# Altium PCB VentilatorRev1InterimDaughtercard.PcbDoc
Units mm, origin at the board's own origin, x right, y up, seen from the top; angles counter-clockwise.
Board outline 70 x 58 mm, 2 copper layers (Top Layer, Bottom Layer), stack 1.595 mm thick; 50 components, 46 nets, 183 pads, 47 vias.
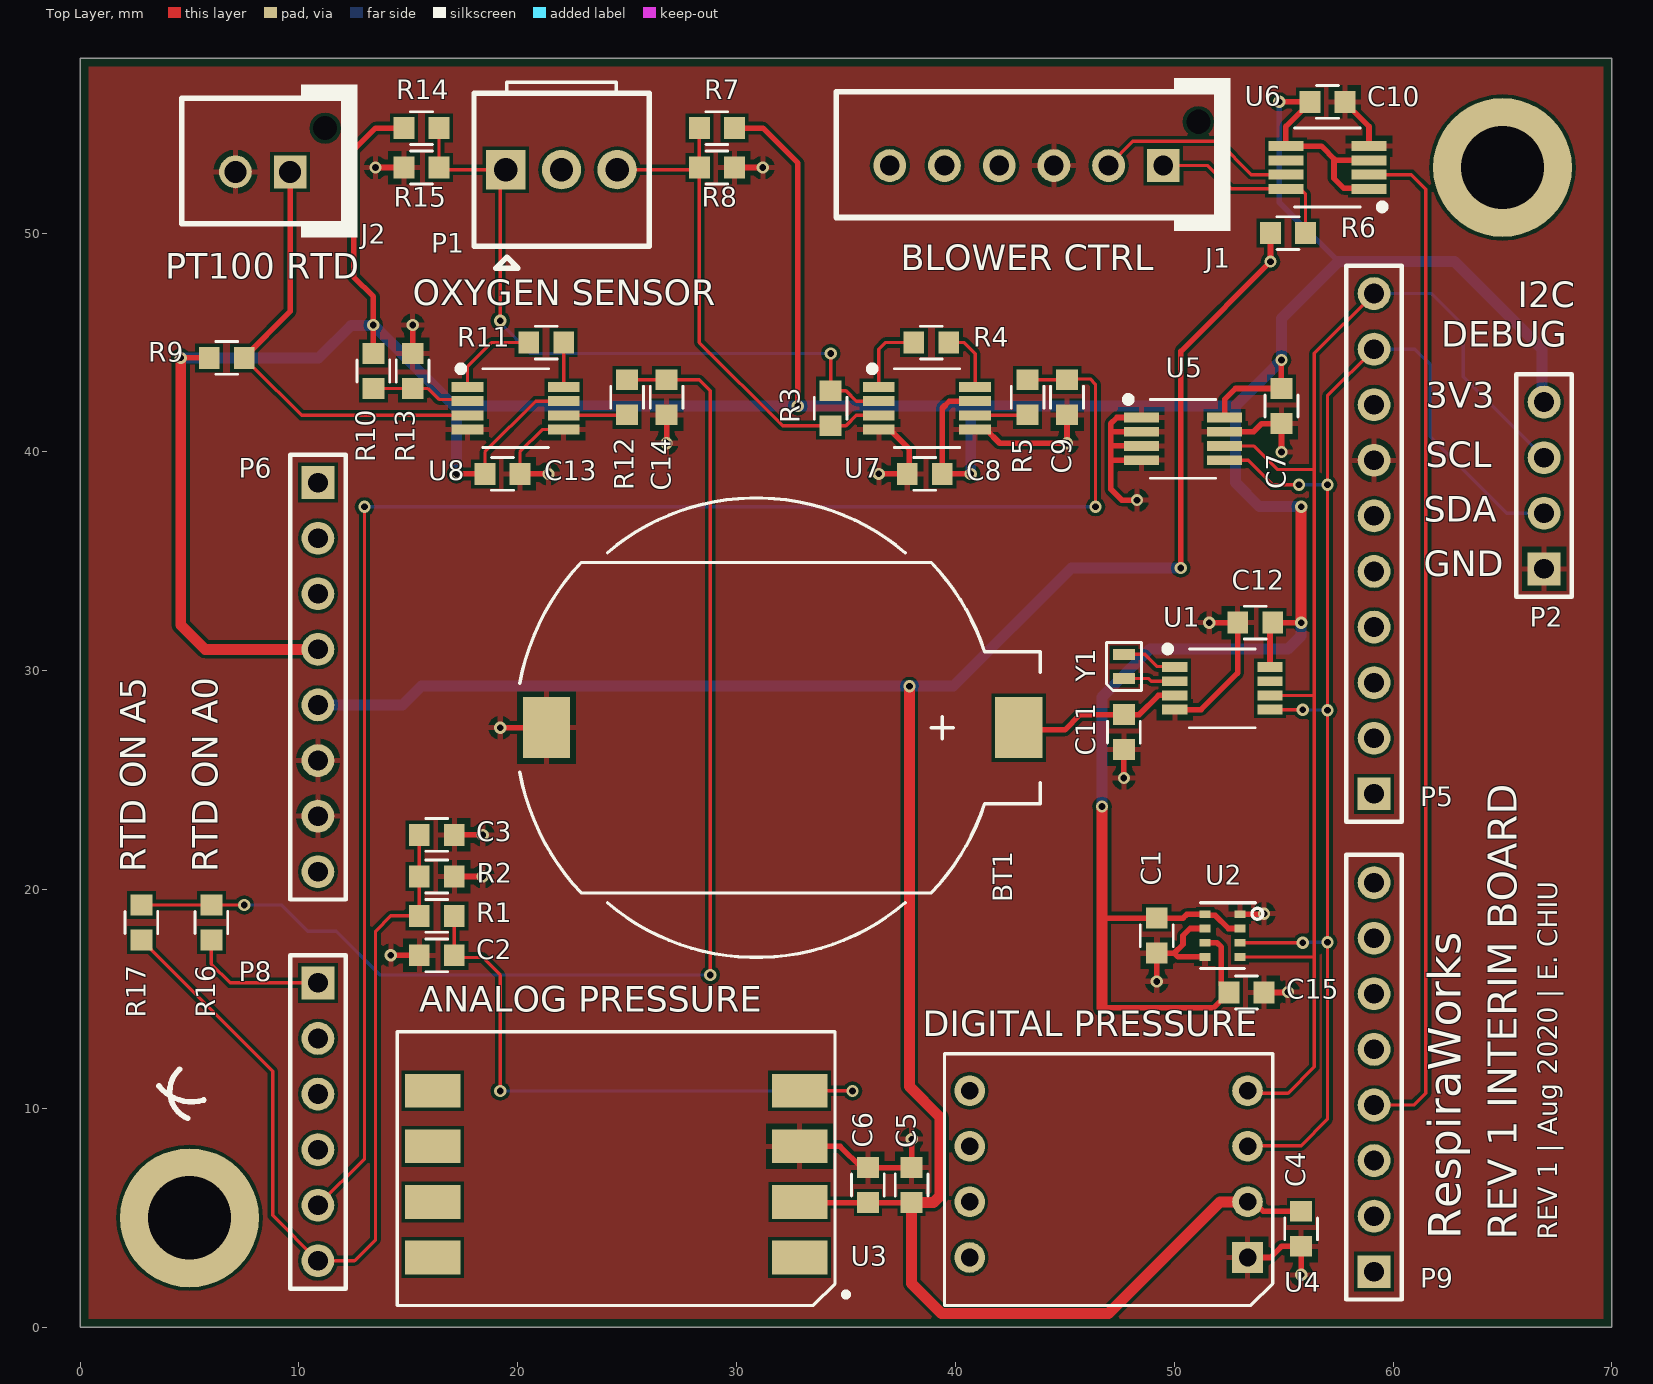
[diagram p0: Top Layer view]
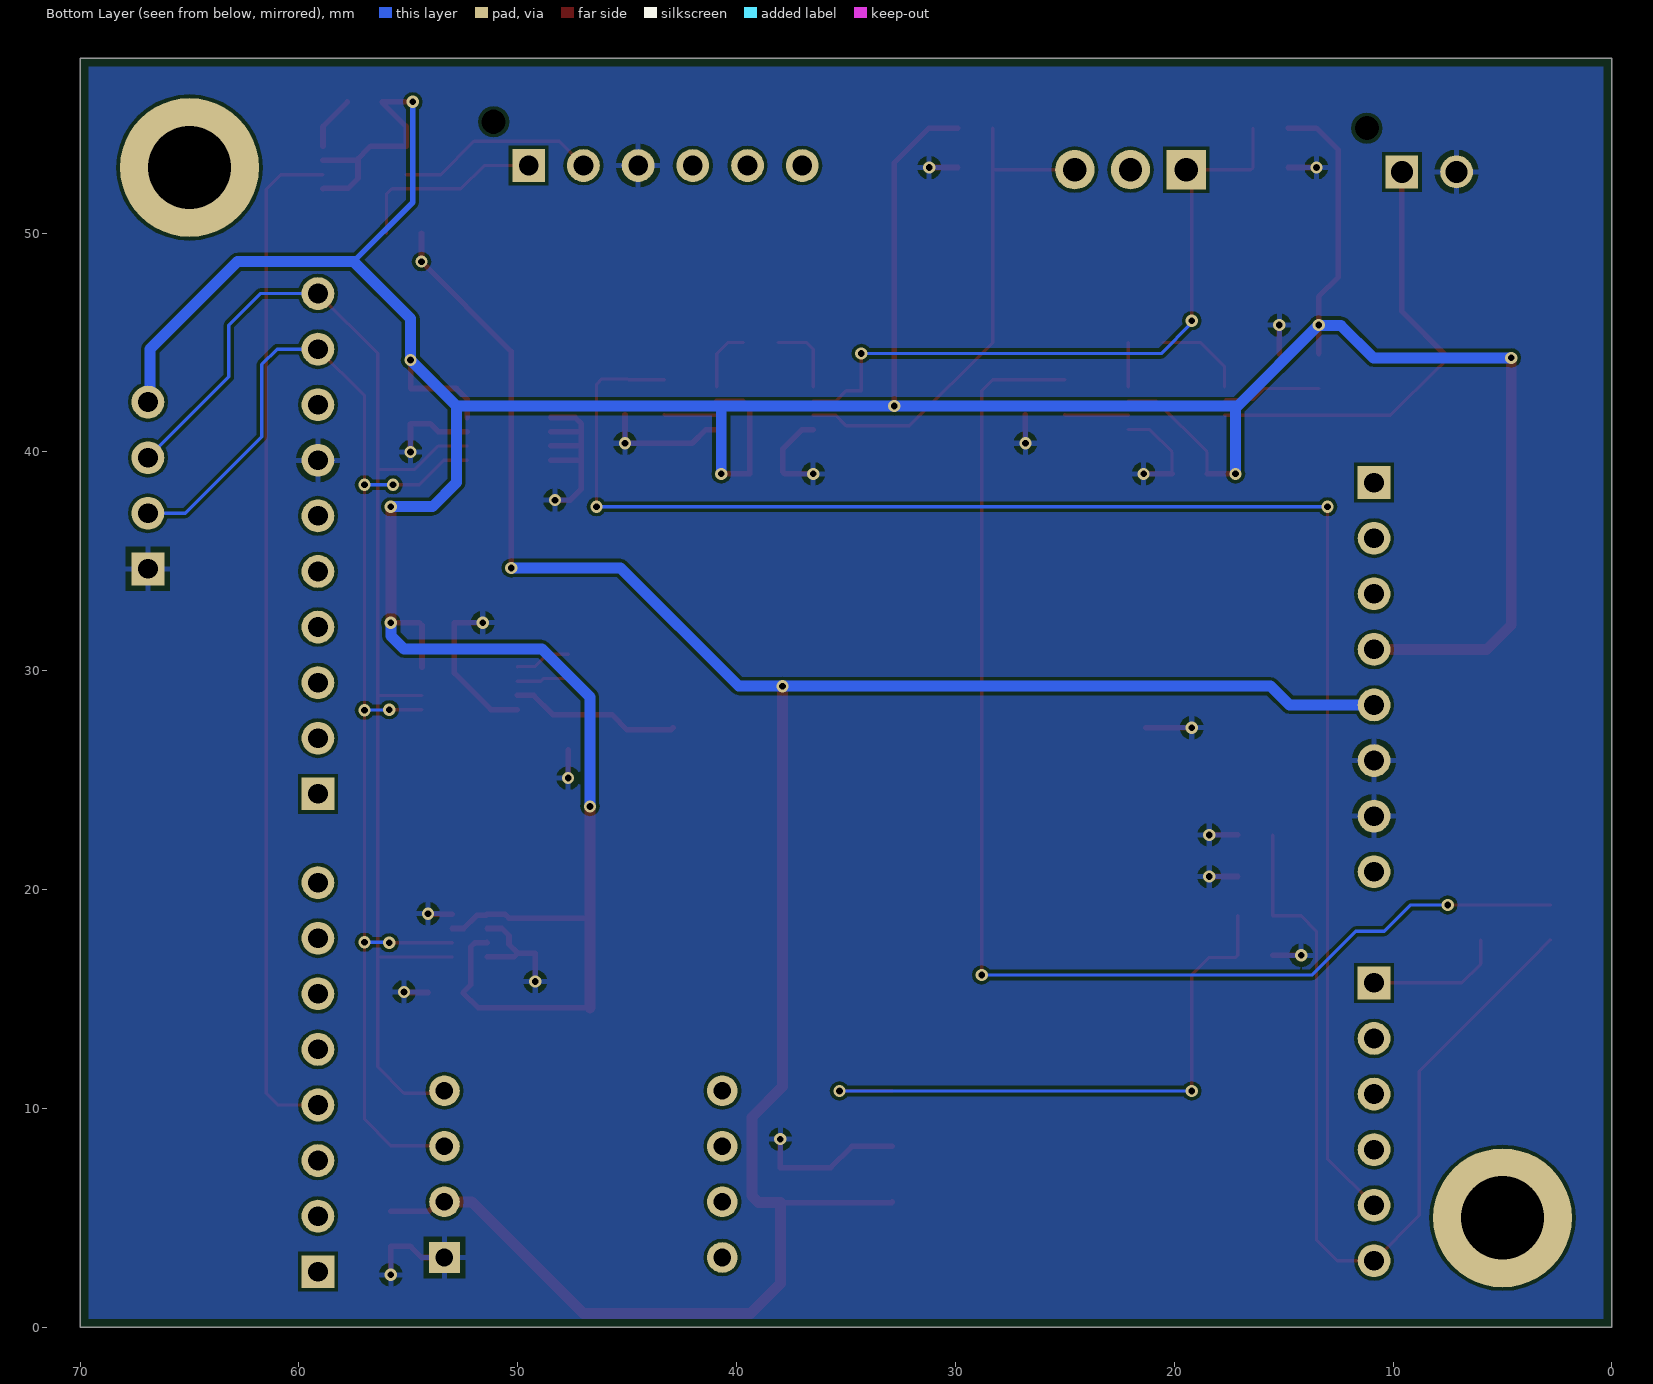
[diagram p1: Bottom Layer view, seen from below]

## Layer stack, top to bottom
Top Solder: solder mask 0.0102, Solder Resist, Dk 3.5
Top Layer: signal copper 0.0356
Dielectric 1: core 1.524, FR-4, Dk 4.2
Bottom Layer: signal copper 0.0356
Bottom Solder: solder mask 0.0102, Solder Resist, Dk 3.5

## Board outline
0,0 70,0 70,58 0,58

## Design rules (kind name [scope] priority, off if disabled: settings)
BoardOutlineClearance [All] p1: gap=0.381 ignorepadtopadclearanceinfootprint=FALSE
Clearance [All] p1: gap=0.152 ignorepadtopadclearanceinfootprint=FALSE
Height [All] p1: minheight=0 maxheight=50 prefheight=12.7
HoleSize [All] p1: absolutevalues=TRUE maxlimit=10 minlimit=0.305 maxpercent=80.000 minpercent=20.000
MinimumAnnularRing [All] p1: minimumring=0.127
MinimumSolderMaskSliver [All] p1: minsoldermaskwidth=0.025
PlaneConnect [All] p1: planeconnectstyle=Direct reliefexpansion=0.508 reliefentries=4 reliefconductorwidth=0.254 reliefairgap=0.254
PolygonConnect [All] p1: connectstyle=Relief reliefconductorwidth=0.254 reliefentries=4 polygonreliefangle="90 Angle" airgapwidth=0.254
RoomDefinition VentilatorRev1InterimDaughtercard [InComponentClass('VentilatorRev1InterimDaughtercard')] p1 off: confinementstyle=ConfineIn formatcopy=TRUE lockcomponents=FALSE outline 90.043,1.524 293.878,1.524 293.878,29.972 90.043,29.972
RoutingVias [All] p1: holewidth=0.711 width=1.27 viastyle="Through Hole" minholewidth=0.711 minwidth=1.27 maxholewidth=0.711 maxwidth=1.27
SilkToSilkClearance [All] p1: silktosilkclearance=0.076
SilkToSolderMaskClearance [IsPad] p1: minsilkscreentomaskgap=0.076 clearancetoexposedcopper=TRUE
SolderMaskExpansion [All] p1: expansion=0.05 istentingtop=FALSE
Width [All] p1: maxlimit=10 minlimit=0.152 preferedwidth=0.152
24 further rules are at their usual default settings.

## Components (designator, comment, footprint, x,y, rotation, side; value= is the part's Value field where it differs from the comment)
BT1 "CR2016" BLP20 30.9,27.4 r180 top locked
C1 "CAP 0603" CAP0603 49.2,17.9 r270 top value=0.1uF
C2 "CAP 0603" CAP0603 16.3,17 r180 top value=470pF
C3 "CAP 0603" CAP0603 16.3,22.5 r0 top value=1.5uF
C4 "CAP 0603" CAP0603 55.8,4.5 r270 top value=0.1uF
C5 "CAP 0603" CAP0603 38,6.5 r270 top value=1uF
C6 "CAP 0603" CAP0603 36,6.5 r270 top value=0.01uF
C7 "CAP 0603" CAP0603 54.9,42.1 r270 top value=0.1uF
C8 "CAP 0603" CAP0603 38.6,39 r180 top value=0.1uF
C9 "CAP 0603" CAP0603 45.1,42.5 r270 top value=1.5uF
C10 "CAP 0603" CAP0603 57,56 r0 top value=0.1uF
C11 "CAP 0603" CAP0603 47.7,27.2 r270 top value=0.1uF
C12 "CAP 0603" CAP0603 53.7,32.2 r180 top value=0.1uF
C13 "CAP 0603" CAP0603 19.3,39 r0 top value=0.1uF
C14 "CAP 0603" CAP0603 26.8,42.5 r270 top value=1.5uF
C15 "CAP 0603" CAP0603 53.3,15.3 r0 top value=0.1uF
J1 "B6B-XH-AM(LF)(SN)" JST_B6B-XH-AM 49.5,53.09 r180 top locked
J2 "B2B-XH-AM(LF)(SN)" JST_B2B-XH-AM 9.6,52.8 r180 top locked
P1 "KK 3.0" 22232031 22,52.9 r0 top locked
P2 "Header 4" HDR1X4 66.9,34.66 r90 top locked
P5 "0.100\" Sockets" ESQ-110-14-T-S 59.13,24.38 r90 top locked
P6 "0.100\" Sockets" ESQ-108-14-T-S 10.87,38.6 r270 top locked
P8 "0.100\" Sockets" ESQ-106-14-T-S 10.87,15.74 r270 top locked
P9 "0.100\" Sockets" ESQ-108-14-T-S 59.13,2.54 r90 top locked
R1 "RES 0603" RES0603 16.3,18.8 r0 top value=1.5k
R2 "RES 0603" RES0603 16.3,20.6 r0 top value=3k
R3 "RES 0603" RES0603 34.3,42 r270 top value=10k
R4 "RES 0603" RES0603 38.9,45 r0 top value=2.05k
R5 "RES 0603" RES0603 43.3,42.5 r90 top value=1k
R6 "RES 0603" RES0603 55.2,50 r0 top value=0
R7 "RES 0603" RES0603 29.1,54.8 r180 top value=10k
R8 "RES 0603" RES0603 29.1,53 r0 top value=10k
R9 "RES 0603" RES0603 6.7,44.3 r0 top value=2.7k
R10 "RES 0603" RES0603 13.4,43.7 r270 top value=2.7k
R11 "RES 0603" RES0603 21.3,45 r0 top value=3.0k
R12 "RES 0603" RES0603 25,42.5 r90 top value=1k
R13 "RES 0603" RES0603 15.2,43.7 r90 top value=82.0
R14 "RES 0603" RES0603 15.6,54.8 r0 top value=10k
R15 "RES 0603" RES0603 15.6,53 r180 top value=10k
R16 "RES 0603" RES0603 6,18.5 r270 top value=0
R17 "RES 0603" RES0603 2.8,18.5 r270 top value=0
U1 "PCF85363ATT/AJ" 8-MSOP-3.0MM 52.2,29.2 r0 top
U2 "BMP280" BMP280 52.2,17.9 r0 top
U3 "MPXV5010DP" 8-SOP-MPXV 24.5,7 r180 top locked
U4 "4525DO-DS5AI001DP" 4525do 47,7 r180 top locked
U5 "256Kbit" 8-MSOP 50.4,40.6 r0 top value=32Kbit
U6 "SN74LVC2T45DCTR" 8-MSOP 57,53 r180 top
U7 "INA333" 8-VSSOP 38.7,42 r0 top
U8 "INA333" 8-VSSOP 19.9,42 r0 top
Y1 "32.7680KHZ" 2-ABS05 47.7,30.2 r90 top

## Footprints (in the part's own frame and the unit in brackets; to place one, negate y for a bottom-side part, rotate by r counter-clockwise, add the part's x,y. Pads: shape width x height; smd on the part's side, far side on the other; paste and mask are expansions set on the pad)
2-ABS05 [mm] "2-pin 1.0x1.6mm SMT Crystal Footprint"
  rect 0.5x1 smd: 1(-0.55,0) 2(0.55,0)
  silkscreen extent -1.1,-0.8 1.1,0.8, body extent -0.8,-0.5 0.8,0.5, height 0.5
8-MSOP [mm] "8-pin MSOP (2.80mm wide)"
  rect 1.6x0.45 smd: 1(-1.9,0.975) 2(-1.9,0.325) 3(-1.9,-0.325) 4(-1.9,-0.975) 5(1.9,-0.975) 6(1.9,-0.325) 7(1.9,0.325) 8(1.9,0.975)
  silkscreen extent -2.64,-1.8 1.5,1.94, body extent -2.12,-1.57 2.12,1.58, height 1.3
8-MSOP-3.0MM [mm] "8-pin MSOP (3.00mm wide)"
  rect 1.15x0.45 smd: 1(-2.175,0.975) 2(-2.175,0.325) 3(-2.175,-0.325) 4(-2.175,-0.975) 5(2.175,-0.975) 6(2.175,-0.325) 7(2.175,0.325) 8(2.175,0.975)
  silkscreen extent -2.64,-1.8 1.5,1.94, body extent -2.12,-1.57 2.12,1.58, height 1.3
8-SOP-MPXV [mm] "8-pin SOP Dual Ported Pressure Sensor Package"
  rect 2.54x1.54 smd: 1(-8.38,3.81) 2(-8.38,1.27) 3(-8.38,-1.27) 4(-8.38,-3.81) 5(8.38,-3.81) 6(8.38,-1.27) 7(8.38,1.27) 8(8.38,3.81)
  silkscreen extent -10.6,-6.5 10,6, body extent -8.79,-6.04 8.79,12.38, height 10.47
8-VSSOP [mm] "8-pin VSSOOP (3.0mm wide)"
  rect 1.45x0.45 smd: 1(-2.2,0.975) 2(-2.2,0.325) 3(-2.2,-0.325) 4(-2.2,-0.975) 5(2.2,-0.975) 6(2.2,-0.325) 7(2.2,0.325) 8(2.2,0.975)
  silkscreen extent -2.64,-1.8 1.5,1.94, body extent -2.12,-1.57 2.12,1.58, height 1.3
4525do [mm] "4525 DIP Pressure Sensor"
  rect 1.4x1.4 hole 0.8: 1(-6.35,3.81)
  round 1.4 hole 0.8: 2(-6.35,1.27) 3(-6.35,-1.27) 4(-6.35,-3.81) 5(6.35,-3.81) 6(6.35,-1.27) 7(6.35,1.27) 8(6.35,3.81)
  silkscreen extent -7.5,-5.5 7.5,6, body extent -6.48,-4.81 6.48,12.67, height 9.13
22232031 [mm] "Molex KK 0.100\" Male Header"
  rect 1.8x1.8 hole 1.07: 1(-2.54,0)
  round 1.8 hole 1.07: 2(0,0) 3(2.54,0)
  silkscreen extent -4,-4.5 4,4, body extent -3.73,-3.25 3.73,3.1, height 10.68
BLP20 [mm] "MPD 20mm Coin Cell Battery Holder footprint"
  rect 2.16x2.79 smd: M(9.59,0) P(-12,0)
  silkscreen extent -12.98,-10.5 10.81,10.5, body extent -10,-10 10,10, height 2.1
BMP280 [mm] "BOSCH ABS PRESSURE SENSOR"
  rect 0.5x0.35 smd: 1(0.8,0.975) 2(0.8,0.325) 3(0.8,-0.325) 4(0.8,-0.975) 5(-0.8,-0.975) 6(-0.8,-0.325) 7(-0.8,0.325) 8(-0.8,0.975)
  silkscreen extent -1,-1.5 1.85,1.5, body extent -1,-1.25 1,1.25, height 1
CAP0603 [mm] "0603 SMT Capacitor Footprint"
  rect 0.95x1 smd: 1(0.8,0) 2(-0.8,0)
  silkscreen extent -0.5,-0.75 0.5,0.75, body extent -0.8,-0.4 0.8,0.4, height 0.8
ESQ-106-14-T-S [mm] "Tall Connector; Header; 6 Position"
  rect 1.5x1.5 hole 0.9: 1(0,0)
  round 1.5 hole 0.9: 2(2.54,0) 3(5.08,0) 4(7.62,0) 5(10.16,0) 6(12.7,0)
  silkscreen extent -1.27,-1.27 13.97,1.27, body extent -1.52,-1.27 14.22,1.27, height 11.01
ESQ-108-14-T-S [mm] "Tall Connector; Header; 8 Position"
  rect 1.5x1.5 hole 0.9: 1(0,0)
  round 1.5 hole 0.9: 2(2.54,0) 3(5.08,0) 4(7.62,0) 5(10.16,0) 6(12.7,0) 7(15.24,0) 8(17.78,0)
  silkscreen extent -1.27,-1.27 19.05,1.27, body extent -1.52,-1.27 19.3,1.27, height 11.01
ESQ-110-14-T-S [mm] "Tall Connector; Header; 10 Position"
  rect 1.5x1.5 hole 0.9: 1(0,0)
  round 1.5 hole 0.9: 2(2.54,0) 3(5.08,0) 4(7.62,0) 5(10.16,0) 6(12.7,0) 7(15.24,0) 8(17.78,0) 9(20.32,0) 10(22.86,0)
  silkscreen extent -1.27,-1.27 24.13,1.27, body extent -1.52,-1.27 24.38,1.27, height 11.01
HDR1X4 [mm] "Connector; Header; 4 Position"
  rect 1.5x1.5 hole 0.9: 1(0,0)
  round 1.5 hole 0.9: 2(2.54,0) 3(5.08,0) 4(7.62,0)
  silkscreen extent -1.27,-1.27 8.89,1.27
JST_B2B-XH-AM [mm] "CONN HEADER VERT MTG 2POS 2.5MM JST XH"
  rect 1.5x1.5 hole 1: 1(0,0)
  round 1.5 hole 1: 2(2.5,0)
  rect 0x0 hole 1.1 unplated: MH(-1.6,-2)
  silkscreen extent -3.07,-4 4.95,3, body extent -2.45,-3.38 4.95,2.38, height 7
JST_B6B-XH-AM [mm] "CONN HEADER VERT MTG 6POS 2.5MM JST XH"
  rect 1.5x1.5 hole 0.9: 1(0,0)
  round 1.5 hole 0.9: 2(2.5,0) 3(5,0) 4(7.5,0) 5(10,0) 6(12.5,0)
  rect 0x0 hole 1.1 unplated: MH(-1.6,-2)
  silkscreen extent -3.07,-4 14.95,3, body extent -2.45,-3.38 14.95,2.38, height 8.1
RES0603 [mm] "0603 SMT Resistor  Footprint"
  rect 0.95x1 smd: 1(0.8,0) 2(-0.8,0)
  silkscreen extent -0.5,-0.75 0.5,0.75, body extent -0.8,-0.4 0.8,0.4, height 0.8

## Part data
BT1: library part BLP2016SM-GTR, "CR2016 Coil Cell Battery Holder", Manufacturer=MPD, PCB Package=BLP20, Voltage=3V, Manufacturer P/N=BLP2016SM-GTR
C1 C4 C7 C8 C10 C11 C12 C13 C15: "Cap 0603", Manufacturer=Murata, Manufacturer P/N=GRM188R71H104KA93D, PCB Package=0603, Voltage=50V, Type=X7R
C2: "Cap 0603", Manufacturer=Yageo, Manufacturer P/N=CC0603MRX7R9BB471, PCB Package=0603, Voltage=50V, Type=X7R
C3 C9 C14: "Cap 0603", Manufacturer=TDK, Manufacturer P/N=C1608X7R1A155K080AC, PCB Package=0603, Voltage=10V, Type=X7R
C5: "Cap 0603", Manufacturer=Yageo, Manufacturer P/N=CC0603KRX7R6BB105, PCB Package=0603, Voltage=10V, Type=X7R
C6: "Cap 0603", Manufacturer=Samsung, Manufacturer P/N=CL10B103KO8NNNC, PCB Package=0603, Voltage=16V, Type=X7R
J1: "CONN HEADER VERT 6POS 2.5MM", Color=Natural, Manufacturer="JST Sales America Inc.", Supplier Part Number 1=455-1708-ND, Category="Connectors, Interconnects", ComponentLink1Description=http://www.jst-mfg.com/product/pdf/eng/ePH.pdf, ComponentLink1URL=http://www.jst-mfg.com/product/pdf/eng/ePH.pdf, Connector Type="Header, Shrouded", Contact Finish=Tin, Contact Finish Thickness=-, Contact Mating Length="0.130\" (3.30mm)", Contact Type="Male Pin", Fastening Type="Detent Lock", Features=-, Manufacturer P/N=B6B-XH-AM(LF)(SN), Mounting Type="Through Hole", Number of Positions=6, Number of Positions Loaded=All, Number of Rows=1, Packaging=Bulk, Part Status=Active, Pitch="0.079\" (2.00mm)", Pricing 1="1=0.33, 10=0.313, 100=0.2194, 500=0.18808, 1000=0.15674, 5000=0.13435, 10000=0.12539 (USD)", RoHS="RoHS Compliant", Row Spacing=-, Stock 1=30111, Supplier 1=Digi-Key, Termination="Press-Fit, Solder"
J2: "CONN HEADER VERT 2POS 2.5MM", Color=Natural, Manufacturer="JST Sales America Inc.", Supplier Part Number 1=455-1704-ND, Category="Connectors, Interconnects", ComponentLink1Description=http://www.jst-mfg.com/product/pdf/eng/ePH.pdf, ComponentLink1URL=http://www.jst-mfg.com/product/pdf/eng/ePH.pdf, Connector Type="Header, Shrouded", Contact Finish=Tin, Contact Finish Thickness=-, Contact Mating Length="0.130\" (3.30mm)", Contact Type="Male Pin", Fastening Type="Detent Lock", Features=-, Manufacturer P/N=B2B-XH-AM(LF)(SN), Mounting Type="Through Hole", Number of Positions=2, Number of Positions Loaded=All, Number of Rows=1, Packaging=Bulk, Part Status=Active, Pitch="0.079\" (2.00mm)", Pricing 1="1=0.17, 10=0.162, 100=0.1002, 500=0.08288, 1000=0.07252, 5000=0.06216, 10000=0.06044 (USD)", RoHS="RoHS Compliant", Row Spacing=-, Stock 1=207967, Supplier 1=Digi-Key, Termination="Press-Fit, Solder"
P1: library part 22232031, "Conn, KK 0.100\" Male Header", Manufacturer=Molex, Manufacturer P/N=22232031
P2: "Header, 4-Pin", Do Not Populate=DNP, LatestRevisionDate=17-Jul-2002, LatestRevisionNote="Re-released for DXP Platform.", Publisher="Altium Limited"
P5: library part ESQ-110-14-T-S, "Tall Female Header 0.100\" Pitch 8x1 Sockets", Manufacturer=Samtec, Do Not Populate=DNP, PCB Package=ESQ-110-14-T-S
P6 P9: library part ESQ-108-14-T-S, "Tall Female Header 0.100\" Pitch 8x1 Sockets", Manufacturer=Samtec, Do Not Populate=DNP, PCB Package=ESQ-108-14-T-S
P8: library part ESQ-106-14-T-S, "Tall Female Header 0.100\" Pitch 6x1 Sockets", Manufacturer=Samtec, Do Not Populate=DNP, PCB Package=ESQ-106-14-T-S
R1: "Res 0603", Manufacturer=Yageo, Manufacturer P/N=RC0603FR-071K5L, PCB Package=0603, Tolerance=1%
R2: "Res 0603", Manufacturer=Yageo, Manufacturer P/N=RC0603FR-073KL, PCB Package=0603, Tolerance=1%
R3 R7 R8 R14 R15: "Res 0603", Manufacturer=Yageo, Manufacturer P/N=RC0603FR-0710KL, PCB Package=0603, Tolerance=1%
R4: "Res 0603", Manufacturer=Yageo, Manufacturer P/N=RT0603BRD072K05L, PCB Package=0603, Tolerance=0.1%
R5 R12: "Res 0603", Manufacturer=Yageo, Manufacturer P/N=RC0603FR-071KL, PCB Package=0603, Tolerance=1%
R6 R16 R17: "Res 0603", Manufacturer=Yageo, Manufacturer P/N=RC0603JR-070RL, PCB Package=0603, Tolerance=5%, Do Not Populate=DNP
R9 R10: "Res 0603", Manufacturer=Panasonic, Manufacturer P/N=ERA-3AEB272V, PCB Package=0603, Tolerance=0.1%
R11: "Res 0603", Manufacturer=Yageo, Manufacturer P/N=RT0603BRE073KL, PCB Package=0603, Tolerance=0.1%
R13: "Res 0603", Manufacturer=Panasonic, Manufacturer P/N=ERA-3AEB820V, PCB Package=0603, Tolerance=0.1%
U1: "Real Time Clock (RTC) IC Clock/Calendar 64B I²C, 2-Wire Serial 8-TSSOP, 8-MSOP (0.118\", 3.00mm Width)", Manufacturer=NXP, PCB Package=8-MSOP-3.0MM, Manufacturer P/N=PCF85363ATT/AJ
U2: "Pressure Sensor 4.35PSI ~ 15.95PSI (30kPa ~ 110kPa) Absolute  16b 8-SMD", Manufacturer="Bosch Sensortec", Manufacturer P/N=BMP280, PCB Package=BMP280
U3: "Pressure Sensor 1.45PSI (10kPa) Differential Male - 0.13\" (3.3mm) Tube, Dual 0.2 V ~ 4.7 V 8-BSOP (0.475\", 12.06mm Width) Dual Ports, Same Side", Manufacturer=NXP, PCB Package=8-SOP-MPXV, Do Not Populate=DNP, Manufacturer P/N=MPXV5010DP
U4: "Pressure Sensor 1PSI (6.89kPa) Differential Male - 0.14\" (3.56mm) Tube, Dual 14 b 8-DIP Module", Manufacturer="TE Connectivity", PCB Package=4525DO, Do Not Populate=DNP, Manufacturer P/N=4525DO-DS5AI001DP
U5: library part 24LC256T-I/MS, "IC EEPROM 256KBIT I2C 400KHZ 8MSOP", Manufacturer=Microchip, PCB Package=8-MSOP, Tolerance=25ppm, Manufacturer P/N=24LC256T-I/MS
U6: "Bidirectional Level Shifter 2-ch", Manufacturer="Texas Instruments", PCB Package=16-TSSOP, Manufacturer P/N=SN74LVC2T45DCTR
U7 U8: "Instrumentation Amp, GBW=1MHz", Manufacturer="Texas Instruments", Manufacturer P/N=INA333AIDGKR, PCB Package=8-VSSOP
Y1: library part ABS05-32.768KHZ-T, "CRYSTAL 32.7680KHZ 12.5PF SMD 1x1.6mm", Manufacturer=Abracon, Tolerance=20ppm, Manufacturer P/N=ABS05-32.768KHZ-T, PCB Package=ABS05-32.768KHZ-T

## Free pads (board coordinates)
  round 6.35 hole 3.81: M1(5,5) M2(65,53)

## Via types
v1: diameter 0.559, hole 0.305, Top Layer to Bottom Layer, tented both sides, 47 vias

## Nets (pads, with @x,y where several pads share a name; then routed paths per layer and width w, separated by ;. In a path a pad name is that pad's centre, name@x,y a point inside that pad or via, vN(x,y) a via of type N, cw(c..) or ccw(c..) an arc to the next point about the centre after c; other vN are vias at no path point)
3V3: C1.2 C7.2 C8.2 C10.2 C12.2 C13.2 C15.2 P2.4 P6.4 R7.2 R9.2 R10.2 R14.2 U1.8 U2.2 U2.6 U2.8 U5.8 U6.1 U6.3 U6.5 U7.7 U8.7 | length 219.2
  Top Layer w0.152: C13.2 18.5,40 20.825,42.325 U8.7
  Top Layer w0.254: v1(4.6,44.3) R9.2 ; R10.2 v1(13.4,45.8) 13.4,47.1 12.5,48 12.5,53.8 13.5,54.8 R14.2 ; v1(17.2,39) C13.2 ; R7.2 31.2,54.8 32.8,53.2 v1(32.8,42.1) ; v1(40.7,39) C8.2 39.4,42 39.725,42.325 U7.7 ; 46.7,14.6 51.8,14.6 52.127,14.927 52.152,14.927 52.5,15.275 C15.2 52.152,15.648 52.152,17.374 51.951,17.575 U2.6 U2.6@51.415,17.59 ; 46.7,18.7 C1.2 50.4,18.7 50.575,18.875 U2.8 51.448,18.827 51.873,18.827 52.475,18.225 U2.2 ; U5.8 52.3,42.4 52.8,42.9 C7.2 v1(54.9,44.2) ; U1.8 54.375,32.075 C12.2 v1(55.8,32.2) ; v1(54.8,56) C10.2 56.2,55.975 55.1,54.875 U6.5 56.725,53.975 57.375,53.325 U6.3 ; 57.3,53.4 57.3,52.5 57.752,52.048 58.877,52.048 U6.1
  Top Layer w0.5: v1(4.6,44.3) 4.6,32.1 5.72,30.98 P6.4 ; 46.7,14.6 46.7,18.7 v1(46.7,23.8) ; v1@55.8,32.2 v1(55.8,37.5)
  Bottom Layer w0.254: v1(54.8,56) 54.8,51.4 57.5,48.7
  Bottom Layer w0.5: v1(4.6,44.3) 10.9,44.3 12.389,45.789 13.389,45.789 v1(13.4,45.8) 17.1,42.1 ; v1(17.2,39) 17.2,42 17.1,42.1 ; v1(40.7,39) 40.7,42 40.8,42.1 ; v1(46.7,23.8) 46.7,28.8 48.9,31 55.2,31 55.789,31.589 55.789,32.189 v1(55.8,32.2) ; v1(55.8,37.5) 53.9,37.5 52.8,38.6 52.8,42.1 ; P2.4 66.8,42.38 66.8,44.7 62.8,48.7 57.5,48.7 54.9,46.1 v1(54.9,44.2) 52.8,42.1 ; 17.1,42.1 40.8,42.1 ; 40.8,42.1 52.8,42.1
5V: C4.2 C5.1 C6.1 P6.5 R6.2 U3.2 U4.2 | length 113.8
  Top Layer w0.254: U3.2 32.91,5.7 C6.1 C5.1 ; v1(50.3,34.7) 50.3,44.6 v1(54.4,48.7) R6.2 ; U4.2 53.642,5.73 54.072,5.3 54.8,5.3 C4.2
  Top Layer w0.5: v1(37.9,29.3) 37.9,11 39.3,9.6 39.3,5.993 39.007,5.7 C5.1 38,2 39.369,0.631 47,0.631 52.099,5.73 U4.2
  Bottom Layer w0.5: P6.5 14.74,28.44 15.6,29.3 v1(37.9,29.3) 39.9,29.3 45.3,34.7 v1(50.3,34.7)
A0: P8.1 R16.1 | length 6.3
  Top Layer w0.152: R16.1 6,16.6 6.86,15.74 P8.1
A1: P8.2
A2: P8.3
A3: P8.4
A4: C9.2 P8.5 R5.1 | length 75
  Top Layer w0.152: P8.5 13,7.71 v1(13,37.5) ; R5.1 44.925,43.3 44.962,43.337 46.163,43.337 46.4,43.1 v1(46.4,37.5)
  Bottom Layer w0.152: v1(13,37.5) v1(46.4,37.5)
A5: C3.2 P8.6 R1.2 R2.2 R17.1 | length 41.1
  Top Layer w0.152: R17.1 2.825,17.7 3.224,17.301 3.224,17.276 8.8,11.7 8.8,5.11 P8.6 12.54,3.04 13.5,4 13.5,18.1 14.2,18.8 14.787,18.8 R1.2 R2.2 C3.2
AVDD: P5.8
BLOWER-CTRL: P9.4 U6.2 | length 46.8
  Top Layer w0.152: U6.2 60.825,52.675 61.5,52 61.5,48.7 61.5,10.7 60.96,10.16 P9.4
BLOWER-CTRL-5V: J1.2 U6.7 | length 9.2
  Top Layer w0.152: J1.2 48.11,54.2 52,54.2 53.525,52.675 U6.7
D2: P9.3
D4: P9.5
D7: P9.8
D8: P5.1
GND: BT1.M C1.1 C2.1 C3.1 C4.1 C5.2 C6.2 C7.1 C8.1 C9.1 C10.1 C11.1 C12.1 C13.1 C14.1 C15.1 J1.3 J2.2 P2.1 P5.7 P6.6 P6.7 R2.1 R8.1 R13.1 R15.1 U1.4 U2.1 U2.5 U2.7 U3.3 U4.1 U5.1 U5.2 U5.3 U5.4 U5.7 U6.4 U7.4 U7.5 U8.4 U8.5 | length 69.3
  Top Layer w0.152: C13.1 20.1,40 21.125,41.025 U8.5
  Top Layer w0.254: v1(13.5,53) R15.1 ; v1(14.2,17) C2.1 ; R13.1 v1(15.2,45.8) ; R2.1 v1(18.4,20.6) ; C3.1 v1(18.4,22.5) ; v1(19.2,27.4) BT1.M ; C13.1 v1(21.4,39) ; v1(26.8,40.4) C14.1 ; R8.1 v1(31.2,53) ; U3.3 34.73,8.27 35.7,7.3 C6.2 C5.2 v1(38,8.6) ; v1(36.5,39) C8.1 37.9,39.1 37.9,40.125 37,41.025 U7.4 ; U7.5 41.4,41.025 42.025,40.4 v1(45.1,40.4) C9.1 ; v1(47.7,25.1) C11.1@47.7,26.4 ; v1(48.3,37.8) 47.6,37.8 47.1,38.3 47.1,39.6 ; U5.4 47.125,39.625 47.1,39.6 ; U5.3 47.125,40.275 47.1,40.3 ; U5.2 47.125,40.925 47.1,40.9 ; U5.1 47.375,41.575 47.1,41.3 47.1,40.9 ; v1(49.2,15.8) C1.1 50,17.1 ; U1.4 51.225,28.225 52.9,29.9 C12.1 v1(51.6,32.2) ; U2.5 50.175,16.925 50,17.1 ; U2.7 50.725,18.225 50.4,17.9 50.4,17.5 50,17.1 ; U5.7 53.625,40.925 54,41.3 C7.1 v1(54.9,40) ; U2.1 v1@53.875,18.875 ; U4.1 54.39,3.19 54.9,3.7 C4.1 v1(55.8,2.4) ; C15.1 v1@54.975,15.3 ; C10.1 57.8,55.975 58.9,54.875 U6.4 ; 47.1,39.6 47.1,40.3 ; 47.1,40.3 47.1,40.9
  other v1: 55.2,15.325 54.1,18.9
IOREF: P6.2
MISO-D12: P5.5
NetBT1_P: BT1.P C11.2 U1.3 | length 7.8
  Top Layer w0.254: BT1.P 43,27.3 45,27.3 45.7,28 C11.2 48.4,28 49.275,28.875 U1.3
NetC2_2: C2.2 R1.1 U3.4 | length 28.1
  Top Layer w0.152: R1.1 C2.2 17.2,16.9 18.4,16.9 19.2,16.1 v1(19.2,10.8) ; U3.4 35.29,10.81 v1(35.3,10.8)
  Bottom Layer w0.152: v1(19.2,10.8) v1(35.3,10.8)
NetC14_2: C14.2 R12.1 R16.2 R17.2 | length 58
  Top Layer w0.152: R17.2 v1(7.5,19.3) ; R12.1 28.3,43.3 28.8,42.8 v1(28.8,16.1)
  Bottom Layer w0.152: v1(7.5,19.3) 9.2,19.3 10.4,18.1 11.7,18.1 13.7,16.1 v1(28.8,16.1)
NetJ1_1: J1.1 R6.1 U6.8 | length 8.8
  Top Layer w0.152: J1.1 51.535,53.09 52.6,52.025 U6.8 55.75,52.025 56,51.775 R6.1
NetJ2_1: J2.1 R9.1 U8.3 | length 20.7
  Top Layer w0.152: R9.1@7.5,44.275 7.899,43.876 7.924,43.876 10.125,41.675 U8.3
  Top Layer w0.254: R9.1@7.5,44.275 R9.1 7.5,44.325 9.6,46.425 J2.1
NetR4_1: R4.1 U7.8 | length 2.9
  Top Layer w0.152: R4.1 40.4,45 40.9,44.5 U7.8
NetR4_2: R4.2 U7.1 | length 3.4
  Top Layer w0.152: U7.1 36.5,44.7 36.8,45 R4.2@38.1,45
NetR10_1: R10.1 R13.2 U8.2 | length 4.5
  Top Layer w0.152: R10.1 R13.2 ; R13.2 15.9,42.9 16.4,42.4 17.625,42.4 U8.2
NetR11_1: R11.1 U8.8 | length 2
  Top Layer w0.152: U8.8 R11.1
NetR11_2: R11.2 U8.1 | length 4.2
  Top Layer w0.152: U8.1 17.7,43.9 18.8,45 R11.2
NetU1_1: U1.1 Y1.2 | length 2.6
  Top Layer w0.152: Y1.2 48.65,30.75 49.2,30.2 50,30.2 U1.1
NetU1_2: U1.2 Y1.1 | length 2.4
  Top Layer w0.152: Y1.1 48.823,29.65 48.948,29.525 U1.2
NRST: P6.3
O2-N: P1.1 R3.2 R14.1 R15.2 U7.2 | length 31.8
  Top Layer w0.152: R14.1 R15.2 16.5,52.9 P1.1 19.2,52.64 v1(19.2,46) ; v1(34.3,44.5) R3.2 35,42.8 35.475,42.325 U7.2
  Bottom Layer w0.152: v1(19.2,46) 19.2,45.9 20.6,44.5 v1(34.3,44.5)
O2-OUT: R5.2 U7.6 | length 2.4
  Top Layer w0.152: U7.6 43.275,41.675 R5.2
O2-P: P1.3 R3.1 R7.1 R8.2 U7.3 | length 23.6
  Top Layer w0.152: P1.3 28.2,52.9 R8.2 ; R7.1 R8.2 ; U7.3 35.475,41.675 35,41.2 R3.1 32.1,41.2 28.3,45 R8.2
PWM-CS-D10: P5.3
PWM-D5: P9.6
PWM-D6: P9.7
PWM-D9: P5.2
PWM-MOSI-D11: P5.4
RTD-OUT: R12.2 U8.6 | length 2.9
  Top Layer w0.152: U8.6 24.975,41.675 R12.2
RX-D0: P9.1
SCK-D13: P5.6
SCL-D15: P2.3 P5.10 U1.6 U2.4 U4.4 U5.6 | length 62.3
  Top Layer w0.152: U5.6 53.625,40.275 54.7,39.2 56.4,39.2 ; U2.4 56.375,16.925 56.4,16.9 ; U4.4 53.46,10.7 55.2,10.7 56.4,11.9 56.4,16.9 ; U1.6 56.375,28.875 56.4,28.9 ; P5.10 56.4,44.51 56.4,39.2 ; 56.4,16.9 56.4,28.9 ; 56.4,28.9 56.4,39.2
  Bottom Layer w0.152: P5.10 61.76,47.24 63.2,45.8 63.2,43.44 P2.3
SDA-D14: P2.2 P5.9 U1.5 U2.3 U4.3 U5.5 | length 64.9
  Top Layer w0.152: U5.5 53.375,39.625 54.5,38.5 v1(55.7,38.5) ; U2.3 v1(55.875,17.575) ; U4.3 53.38,8.3 55.8,8.3 57,9.5 v1(57,28.2) v1(57,38.5) 57,42.57 P5.9 ; U1.5 v1(55.875,28.225)
  Bottom Layer w0.152: v1(55.7,38.5) v1(57,38.5) ; v1(55.875,17.575) 55.9,17.6 v1(57,17.6) ; v1(55.875,28.225) 55.888,28.212 56.988,28.212 v1(57,28.2) ; P5.9 61,44.7 61.7,44 61.7,40.7 65.2,37.2 P2.2
TX-D1: P9.2
VIN: P6.8
pads on no net: J1.4 J1.5 J1.6 J1.MH J2.MH P1.2 P6.1 U1.7 U3.1 U3.5 U3.6 U3.7 U3.8 U4.5 U4.6 U4.7 U4.8 U6.6

## Polygon pours and split planes (outlines as drawn)
GND on Bottom Layer "BOTTOM-GND" (solid, pour order 0): 0,58 0,0 70,0 70,58
GND on Top Layer "TOP-GND" (solid, pour order 1): 0,0 70,0 70,58 0,58

## Silkscreen, mask and mechanical layers (free items; w line width, h text height)
Top Overlay:
  lines w0.254: 3.607,11.027 ccw(c5.094,12.199) 5.644,10.387 ; 4.544,11.787 ccw(c5.444,10.787) 4.926,9.545
  text "BLOWER CTRL" at 37.5,47.922 h2
  text "PT100 RTD" at 3.9,47.522 h2
  text "OXYGEN SENSOR" at 15.2,46.322 h2
  text "I2C" at 65.7,46.222 h2
  text "DEBUG" at 62.2,44.422 h2
  text "3V3" at 61.5,41.622 h2
  text "SCL" at 61.5,38.922 h2
  text "SDA" at 61.4,36.422 h2
  text "GND" at 61.4,33.922 h2
  text "RTD ON A5" at 3.378,20.8 h2 r90
  text "RTD ON A0" at 6.678,20.8 h2 r90
  text "ANALOG PRESSURE" at 15.5,14.022 h2
  text "DIGITAL PRESSURE" at 38.5,12.922 h2
  text "RespiraWorks" at 63.6,4.018 h2.54 r90
  text "REV 1 INTERIM BOARD" at 66.1,4 h2.29 r90
  text "REV 1 | Aug 2020 | E. CHIU" at 67.8,4 h1.52 r90
Mechanical 3:
  the board outline again, w0.254
Mechanical 16:
  lines w0.127: 306.835,-13.94 421.135,-13.94 ; 306.835,-6.32 421.135,-6.32 ; 306.835,1.3 344.935,1.3 ; 336.2,189.4 336.3,189.4 336.4,189.4 ; 336.2,191.7 336.3,191.7 336.4,191.7 336.4,189.4 ; 336.4,175.6 336.4,177.9 336.4,180.2 336.4,182.5 336.4,184.8 336.4,187.1 336.4,189.4 ; 344.7,175.6 344.7,177.9 344.7,180.2 344.7,182.5 344.7,184.8 344.7,187.1 344.7,189.4 ; 344.935,-21.56 344.935,-6.32 344.935,8.92 ; 352.8,189.4 344.7,189.4 ; 352.8,191.7 344.7,191.7 344.7,189.4 ; 364.8,189.4 364.9,189.4 ; 364.8,191.7 364.9,191.7 364.9,189.4 ; 364.9,175.6 364.9,177.9 364.9,180.2 364.9,182.5 364.9,184.8 364.9,187.1 364.9,189.4 ; 398.275,-21.56 398.275,-6.32 ; 306.835,-21.56 306.835,8.92 ; 306.835,-21.56 421.135,-21.56 421.135,8.92 344.935,8.92 ; 306.835,-21.56 271.275,-21.56 271.275,8.92 306.835,8.92 ; 306.835,8.92 344.935,8.92 ; 325.3,177.9 325.3,175.6 420.9,175.6 420.9,177.9 ; 325.3,177.9 325.3,180.2 ; 325.3,177.9 420.9,177.9 ; 325.3,180.2 325.3,182.5 ; 325.3,180.2 420.9,180.2 ; 325.3,182.5 325.3,184.8 ; 325.3,182.5 420.9,182.5 ; 325.3,184.8 325.3,187.1 ; 325.3,184.8 420.9,184.8 ; 325.3,187.1 420.9,187.1 ; 325.3,187.1 325.3,189.4 ; 325.3,189.4 420.9,189.4 ; 325.3,189.4 325.3,191.7 420.9,191.7 420.9,189.4 ; 325.3,189.4 420.9,189.4 ; 420.9,177.9 420.9,180.2 ; 420.9,180.2 420.9,182.5 ; 420.9,182.5 420.9,184.8 ; 420.9,184.8 420.9,187.1 ; 420.9,187.1 420.9,189.4
  text "REV" at 337.4,190 h2
  text "ENGINEER" at 345.8,190 h2
  text "DATE" at 326.6,189.9 h2
  text "COMMENT" at 365.7,189.9 h2
  text "1.0" at 337.4,187.7 h1.5
  text "E. CHIU" at 345.8,187.7 h1.5
  text "5 AUG 2020" at 326.6,187.6 h1.5
  text "INITIAL RELEASE" at 365.7,187.6 h2
  text "*" at 337.4,185.4 h2
  text "*" at 345.8,185.4 h2
  text "*" at 326.6,185.3 h2
  text "*" at 365.7,185.3 h2
  text "*" at 337.4,183.1 h2
  text "*" at 345.8,183.1 h2
  text "*" at 326.6,183 h2
  text "*" at 365.7,183 h2
  text "*" at 337.4,180.8 h2
  text "*" at 345.8,180.8 h2
  text "*" at 326.6,180.7 h2
  text "*" at 365.7,180.7 h2
  text "*" at 337.4,178.5 h2
  text "*" at 345.8,178.5 h2
  text "*" at 326.6,178.4 h2
  text "*" at 365.7,178.4 h2
  text "*" at 337.4,176.2 h2
  text "*" at 345.8,176.2 h2
  text "*" at 326.6,176.1 h2
  text "*" at 365.7,176.1 h2
  text "1. LEAD-FREE SOLDER" at 251.4,82.2 h5
  text "2. IPC-A-610 CLASS 2 ASSEMBLY" at 251.4,77.3 h5
  text "3. COMPONENTS ON TOP SIDE ONLY" at 251.46,72.644 h5
  text "4. DO NOT PROCURE OR POPULATE PARTS MARKED DNP ON BOM" at 251.522,68.138 h5
  text "ENGINEER:" at 308.105,6.38 h1.14
  text "TITLE:" at 346.205,6.38 h1.14
  text "E. CHIU" at 315.885,3.1 h3
  text "Ventilator Rev 1 Interim Daughtercard" at 352.285,-1 h3
  text "PCB DESIGNER:" at 308.105,-1.113 h1.14
  text "E. CHIU" at 315.8,-4.3 h3
  text "DATE:" at 308.105,-8.86 h1.14
  text "PART NO.:" at 346.205,-8.86 h1.14
  text "REV:" at 399.545,-8.86 h1.14
  text "RespiraWorks" at 275.085,-11.4 h3
  text ".PRINT_DATE" at 309.375,-11.908 h1.78
  text "1.0" at 402.885,-12 h3
  text "FILE NAME:" at 308.105,-16.48 h1.14
  text "DWG NO:" at 346.205,-16.48 h1.14
  text "SCALE:" at 399.545,-16.48 h1.14
  text ".PCB_FILE_NAME_NO_PATH" at 309.375,-19.528 h1.78
Drill Drawing:
  lines w0.025: 298.419,101.414 300.363,103.358 303.411,106.406 306.459,109.454 309.507,112.502 312.555,115.55 ; 298.419,102.938 298.839,103.358 301.887,106.406 304.935,109.454 307.983,112.502 311.031,115.55 312.555,117.074 ; 298.419,104.462 300.363,106.406 303.411,109.454 306.459,112.502 309.507,115.55 312.555,118.598 ; 298.419,105.986 298.839,106.406 301.887,109.454 304.935,112.502 307.983,115.55 311.031,118.598 312.555,120.122 ; 298.419,107.51 300.363,109.454 303.411,112.502 306.459,115.55 309.507,118.598 312.555,121.646 ; 298.419,109.034 298.839,109.454 301.887,112.502 304.935,115.55 307.983,118.598 311.031,121.646 ; 298.419,110.558 300.363,112.502 303.411,115.55 306.459,118.598 309.507,121.646 ; 298.419,112.082 298.839,112.502 301.887,115.55 304.935,118.598 307.983,121.646 ; 298.419,113.606 300.363,115.55 303.411,118.598 306.459,121.646 ; 298.419,115.13 298.839,115.55 301.887,118.598 304.935,121.646 ; 298.419,116.654 300.363,118.598 303.411,121.646 ; 298.419,118.178 298.839,118.598 301.887,121.646 ; 298.419,119.702 300.363,121.646 ; 298.419,121.226 298.839,121.646 ; 298.839,100.31 301.887,103.358 304.935,106.406 307.983,109.454 311.031,112.502 312.555,114.026 ; 300.363,100.31 303.411,103.358 306.459,106.406 309.507,109.454 312.555,112.502 ; 301.887,100.31 304.935,103.358 307.983,106.406 311.031,109.454 312.555,110.978 ; 303.411,100.31 306.459,103.358 309.507,106.406 312.555,109.454 ; 304.935,100.31 307.983,103.358 311.031,106.406 312.555,107.93 ; 306.459,100.31 309.507,103.358 312.555,106.406 ; 307.983,100.31 311.031,103.358 312.555,104.882 ; 309.507,100.31 312.555,103.358 ; 311.031,100.31 312.555,101.834
  lines w0.381: 251.164,103.358 257.534,103.358 269.845,103.358 280.914,103.358 290.004,103.358 298.419,103.358 312.555,103.358 ; 251.164,106.406 257.534,106.406 269.845,106.406 280.914,106.406 290.004,106.406 298.419,106.406 312.555,106.406 ; 251.164,109.454 257.534,109.454 269.845,109.454 280.914,109.454 290.004,109.454 298.419,109.454 312.555,109.454 ; 251.164,112.502 257.534,112.502 269.845,112.502 280.914,112.502 290.004,112.502 298.419,112.502 312.555,112.502 ; 251.164,115.55 257.534,115.55 269.845,115.55 280.914,115.55 290.004,115.55 298.419,115.55 312.555,115.55 ; 251.164,118.598 257.534,118.598 269.845,118.598 280.914,118.598 290.004,118.598 298.419,118.598 312.555,118.598 ; 251.164,121.646 312.555,121.646 ; 257.534,124.694 257.534,100.31 ; 269.845,124.694 269.845,100.31 ; 280.914,124.694 280.914,100.31 ; 290.004,124.694 290.004,100.31 ; 298.419,124.694 298.419,100.31 ; 257.534,100.31 269.845,100.31 ; 257.534,100.31 251.164,100.31 251.164,124.694 312.555,124.694 312.555,100.31 298.419,100.31 ; 269.845,100.31 280.914,100.31 ; 280.914,100.31 290.004,100.31 ; 290.004,100.31 298.419,100.31
  text "1. FINISH: HASL" at 250.1,174.6 h5
  text "2. SOLDERMASK: GREEN" at 250.1,168.6 h5
  text "3. SILKSCREEN: WHITE" at 250.1,162.6 h5
  text "4. 6MIL TRACE/6MIL SPACE" at 250.1,156.6 h5
  text "5. ELECTRICAL TEST" at 250.19,150.876 h5
  text "Layer" at 252.688,122.408 h1.52
  text "Name" at 259.058,122.408 h1.52
  text "Material" at 271.369,122.408 h1.52
  text "Thickness" at 282.438,122.408 h1.52
  text "Constant" at 291.528,122.408 h1.52
  text "Board Layer Stack" at 299.943,122.408 h1.52
  text "Top Overlay" at 259.058,119.36 h1.52
  text "Top Solder" at 259.058,116.312 h1.52
  text "Solder Resist" at 271.369,116.312 h1.52
  text "0.40mil" at 282.438,116.312 h1.52
  text "3.5" at 291.528,116.312 h1.52
  text "1" at 252.688,113.264 h1.52
  text "Top Layer" at 259.058,113.264 h1.52
  text "Copper" at 271.369,113.264 h1.52
  text "1.40mil" at 282.438,113.264 h1.52
  text "Dielectric 1" at 259.058,110.216 h1.52
  text "FR-4" at 271.369,110.216 h1.52
  text "60.00mil" at 282.438,110.216 h1.52
  text "4.2" at 291.528,110.216 h1.52
  text "2" at 252.687,107.168 h1.52
  text "Bottom Layer" at 259.058,107.168 h1.52
  text "Copper" at 271.369,107.168 h1.52
  text "1.40mil" at 282.438,107.168 h1.52
  text "Bottom Solder" at 259.058,104.12 h1.52
  text "Solder Resist" at 271.369,104.12 h1.52
  text "0.40mil" at 282.438,104.12 h1.52
  text "3.5" at 291.528,104.12 h1.52
  text "Bottom Overlay" at 259.058,101.072 h1.52
  text ".Legend" at 254,18.5 h1.5

## Dimensions
0,0 to 70,0 on Drill Drawing
0,0 to 0,58 on Drill Drawing